# Altium PCB Controller.PcbDoc (part 2 of 2)
Units mil, origin at the board's own origin, x right, y up, seen from the top; angles counter-clockwise.
Board outline 3937.01 x 3937.01 mil, 4 copper layers (Top Layer, GND1, Layer 2, GND2), stack 23.756 mil thick; 99 components, 64 nets, 313 pads, 83 vias.
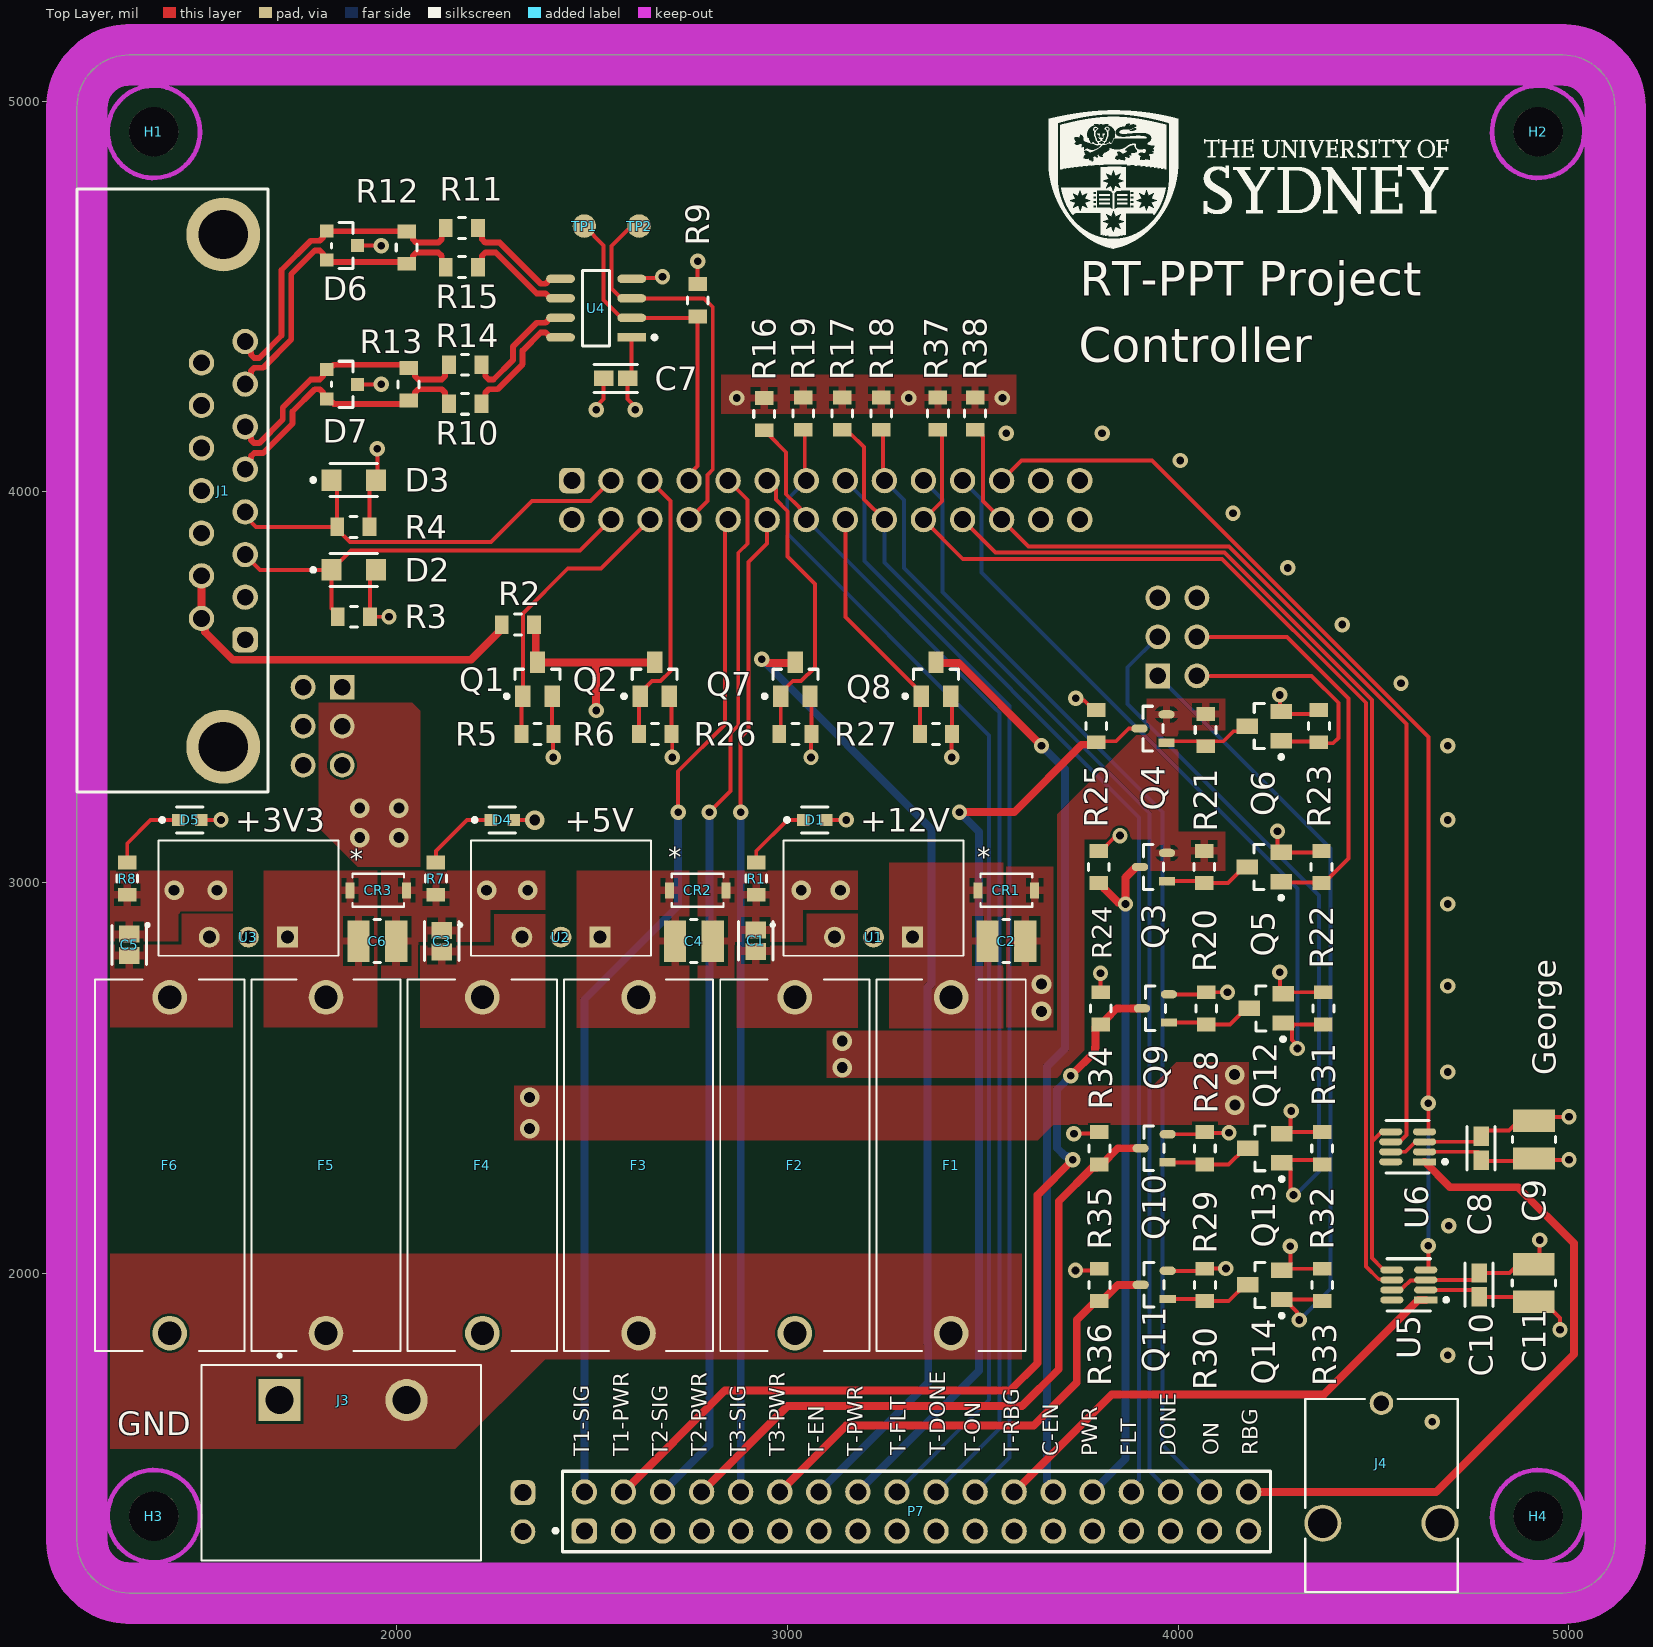
[diagram p0: Top Layer view]

## Via types
v1: diameter 39.37, hole 19.68, Top Layer to GND2, 64 vias
v2: diameter 50, hole 28, Top Layer to GND2, 19 vias

## Nets (pads, with @x,y where several pads share a name; then routed paths per layer and width w, separated by ;. In a path a pad name is that pad's centre, name@x,y a point inside that pad or via, vN(x,y) a via of type N, cw(c..) or ccw(c..) an arc to the next point about the centre after c; other vN are vias at no path point) (continued)
RS422-TX_N: (continued)
  Top Layer w15: J1.7 1611.81,4288.99 1626.32,4303.5 1626.32,4308.71 1635.11,4317.5 1657.89,4317.5 1729.84,4389.45 1729.84,4557.16 1790.18,4617.5 1802.61,4617.5 1811.4,4608.71 1811.4,4601.83 D6.2 1825.1,4588.13 2020.53,4588.13 R12.1 ; R12.1@2030.91,4583.66 2041.12,4593.88 2041.12,4603.71 2049.91,4612.5 2106.16,4612.5 2114.95,4603.71 2114.95,4585.05 R15.2
RS422-TX_P: D6.1 J1.8 R11.2 R12.2 | length 817.1
  Top Layer w15: J1.8 1611.81,4371.01 1626.32,4356.5 1626.32,4351.29 1635.11,4342.5 1647.54,4342.5 1704.84,4399.81 1704.84,4567.52 1779.83,4642.5 1802.61,4642.5 1811.4,4651.29 1811.4,4658.17 D6.1 1821.16,4666.87 2024.47,4666.87 R12.2 ; R12.2@2030.91,4666.34 2041.12,4656.12 2041.12,4646.29 2049.91,4637.5 2106.16,4637.5 2114.95,4646.29 2114.95,4664.95 R11.2
RX_N: R14.2 U4.7 | length 314.5
  Top Layer w15: R14.2 2226.39,4314.95 2226.39,4296.29 2235.18,4287.5 2247.6,4287.5 2297.02,4336.92 2297.02,4371.47 2358.05,4432.5 2380.83,4432.5 2393.33,4445 U4.7
RX_P: R10.2 U4.8 | length 314.5
  Top Layer w15: R10.2 2226.39,4235.05 2226.39,4253.71 2235.18,4262.5 2257.96,4262.5 2322.02,4326.56 2322.02,4361.12 2368.41,4407.5 2380.83,4407.5 2393.33,4395 U4.8
SDI: P2.22 U5.5 U6.5 | length 2788.8
  Top Layer w10: P2.22 3532.42,3844 4118.63,3844 4496,3466.63 4496,2337.34 ; U6.5 4521,2361.85 4515.37,2356.22 4514.88,2356.22 4496,2337.34 ; U5.5 4544.09,2010.97 4523.41,2010.97 4496,2038.38 4496,2337.34
Serial-RX: P2.7 R9.2 TP1.1 U4.2 | length 900.1
  Top Layer w10: TP1.1 2529.29,4630.71 2529.29,4490.67 2574.96,4445 U4.2 2766.34,4445 R9.2 2770,4065.62 2747.83,4043.45 P2.7
Serial-TX: P2.8 TP2.1 U4.3 | length 1048.8
  Top Layer w10: TP2.1 2610.43,4670.43 2590.43,4670.43 2549.29,4629.29 2549.29,4520.67 2574.96,4495 U4.3 2786.21,4495 2808.62,4472.59 2808.62,4056.52 2795.31,4043.21 2795.31,3976.06 P2.8
Switching_Signal: J4.1 P2.25 | length 2909.9
  Layer 2 w20: P2.25 3655.31,4036.06 3655.31,4069.47 3676.84,4091 3783.02,4091 4520,3354.02 J4.1
T1_Pwr: P7.4 Q9.3 R34.2 | length 2298.4
  Top Layer w20: P7.4 2840,1700 3570,1700 3640,1770 3640,2200 v1(3730,2290) ; v1(3725,2505) 3787.2,2567.2 3787.2,2577.2 3787.95,2577.95 3787.95,2628.59 3795.67,2636.3 3807.48,2636.3 3815.2,2644.02 3815.2,2649.92 3842.91,2677.64 Q9.3
  GND2 w20: v1(3725,2505) 3725,2504.73 3690,2469.73 3690,2320 3710.31,2299.69 3715.07,2299.69 3724.76,2290 v1(3730,2290)
T1_Pwr_FPGA: P2.21 Q12.1 R31.2 | length 1975.5
  Top Layer w10: Q12.1 4276.06,2640.24 4290.75,2625.55 4290.75,2597.2 4305,2582.95 v1(4305,2575) ; Q12.1@4292.25,2630.44 4298.11,2636.3 R31.2
  GND2 w10: P2.21 3496.31,3980.1 3496.31,3793.69 4305,2985 v1(4305,2575)
T1_Sig_FPGA: P2.10 P7.2 | length 2640.9
  Top Layer w10: v1(2720,3180) 2720,3284.53 2840,3404.53 2840,3920.75 P2.10
  GND2 w20: P7.2 2480,2700 2720,2940 v1(2720,3180)
T2_Pwr: P7.8 Q10.3 R35.2 | length 1739.9
  Top Layer w20: P7.8 3000,1660 3600,1660 3694,1754 3694,2184 3780.48,2270.48 3790.47,2270.48 R35.2 3804.09,2278.19 3845.43,2319.53 Q10.3
T2_Pwr_FPGA: J2.3 Q13.1 R32.2 | length 1904.4
  Top Layer w10: v1(4295,2200) 4295,2207.95 4287.36,2215.59 4287.36,2267.44 4272.68,2282.13 Q13.1 4272.67,2290 4356.38,2290 R32.2
  GND2 w10: J2.3 3870,3550.75 3870,3456.77 4360,2966.77 4360,2260 4300,2200 v1(4295,2200)
T2_Sig_FPGA: P2.9 P7.6 | length 2706.6
  Top Layer w10: v1(2800,3180) 2854,3234 2854,3381.76 2873.83,3401.6 2873.83,3843.83 2897,3867 2897,3979.42 P2.9@2842.31,4034.1
  GND2 w20: P7.6 2800,1560 v1(2800,3180)
T3_Pwr: P7.12 Q11.3 R36.2 | length 1237.1
  Top Layer w20: P7.12 3150,1610 3630,1610 3740,1720 3740,1880 3780.94,1920.94 3796.54,1920.94 3845.59,1970 Q11.3
T3_Pwr_FPGA: J2.1 Q14.1 R33.2 | length 2037.9
  Top Layer w10: Q14.1 Q14.1@4272.83,1932.6 ; v1(4310,1880) 4304.38,1885.62 4304.38,1901.05 Q14.1@4272.83,1932.6 ; R33.2 4364.41,1932.6 Q14.1@4272.83,1932.6
  GND2 w10: J2.1 4390,3086.42 4390,1960 v1(4310,1880)
T3_Sig_FPGA: P2.12 P7.10 | length 2516.7
  Top Layer w10: v1(2880,3180) 2880,3370.99 2899.83,3390.83 2899.83,3819.83 2947.83,3867.83 P2.12
  GND2 w20: P7.10 v1(2880,3180)
TX_N: R15.1 U4.6 | length 286.4
  Top Layer w15: R15.1 2217.73,4585.05 2217.73,4603.71 2226.52,4612.5 2253.05,4612.5 2358.05,4507.5 2380.83,4507.5 2393.33,4495 U4.6
TX_P: R11.1 U4.5 | length 286.4
  Top Layer w15: R11.1 2217.73,4664.95 2217.73,4646.29 2226.52,4637.5 2263.41,4637.5 2368.41,4532.5 2380.83,4532.5 2393.33,4545 U4.5
pads on no net: H1. H2. H3. H4. J2.5 J2.6 J4.2 J4.3 P2.1 P2.2 P2.26 P2.27 P2.28 U5.8 U6.8

## Polygon pours and split planes (outlines as drawn)
GND on Top Layer "Top Layer-GND" (solid, remove dead copper, pour order 14): 2770,2755 2865,2755 2865,2848.15 3038.89,2848.15 3038.89,2930 3180,2930 3180,3030 2770,3030
GND on Top Layer "NONET_L-01_P-001" (solid, remove dead copper, pour order 15): 3560,2630 3560,3040 3680,3040 3680,2630
GND on Top Layer "Top Layer-GND 1" (solid, remove dead copper, pour order 12): 1960,3030 1960,2848.27 1960.2,2848.27 1960,2848.08 1960,2755 2055,2755 2055,2848.27 2238.83,2848.27 2238.83,2930 2380,2930 2380,3030
NetC2_1 on Top Layer "NONET_L-01_P-001" (solid, remove dead copper, pour order 10): 3260,3050 3260,2626.97 3552.71,2626.97 3552.71,3050
NetC4_1 on Top Layer "NONET_L-01_P-001" (solid, remove dead copper, pour order 7): 2460,3030 2460,2628.27 2748.83,2628.27 2748.83,3030
NetC6_1 on Top Layer "NONET_L-01_P-001" (solid, remove dead copper, pour order 4): 1660,3030 1660,2630 1950,2630 1950,3030
+24V on Top Layer "NONET_L-01_P-001" (solid, remove dead copper, pour order 1): 1150,1550 2150,1550 2380,1780 3600,1780 3600,2050 1150,2050
Dump_LED on Top Layer "Top Layer-Dump_LED" (solid, remove dead copper, pour order 31): 3930,3030 4120,3030 4120,3130 4000,3130 4000,3390 4120,3390 4120,3470 3920,3470 3920,3405 3690,3175 3690,2620 3100,2620 3100,2500 3690,2500 3760,2570 3760,3110 3930,3110
+5V on Top Layer "Top Layer-+5V" (solid, remove dead copper, pour order 34): 2300,2340 3640,2340 3680,2380 4180,2380 4180,2535 4180,2540 3995,2540 3935,2480 2300,2480
+3V3 on Top Layer "NONET_L-01_P-001" (solid, remove dead copper, pour order 32): 2830,4300 2830,4200 3585,4200 3585,4300
+5V on Top Layer "NONET_L-01_P-001" (solid, remove dead copper, pour order 25): 1800,3460 1800,3140 1900,3040 2060,3040 2060,3440 2040,3460
NetC1_1 on Top Layer "NONET_L-01_P-001" (solid, remove dead copper, pour order 8): 3180,2920 3180,2628.15 2870,2628.15 2870,2838.15 3048.89,2838.15 3048.89,2920
NetC5_1 on Top Layer "NONET_L-01_P-001" (solid, remove dead copper, pour order 2): 1580,2920 1580,2630 1230,2630 1230,2840 1450,2840 1450,2920
NetC3_1 on Top Layer "NONET_L-01_P-001" (solid, remove dead copper, pour order 5): 2380,2918.27 2380,2628.27 2060,2628.27 2060,2838.27 2248.83,2838.27 2248.83,2918.27
GND on Top Layer "NONET_L-01_P-001" (solid, remove dead copper, pour order 3): 1230,3030 1230,2850 1440,2850 1440,2920 1580,2920 1580,3030
+5V on GND2 "GND2-+5V" (solid, remove dead copper, pour order 23): 2086.61,1377.95 2401.57,1377.95 2401.57,1929.13 2401.57,3220 1976.85,3220 1800,3220 1800,3140 2086.61,2853.39 2086.61,1929.13
Dump_LED on GND2 "NONET_L-01_P-001" (solid, remove dead copper, pour order 17): 2874.02,1771.65 2874.02,3228.35 1496.06,3228.35 1496.06,3779.53 1653.54,3779.53 1653.54,3775.15 2002.95,3464.57 3188.98,3464.57 3188.98,1771.65
GND on GND2 "NONET_L-01_P-001" (solid, remove dead copper, pour order 19): 3520,4182 3520,4039.06 4448.82,3110.24 4448.82,1574.8 4730,1574.8 4730,3400 3948,4182
+5V on GND2 "NONET_L-01_P-001" (solid, remove dead copper, pour order 24): 3990,2760 3990,1710 4180,1710 4180,2760
GND on GND1 "NONET_L-01_P-001" (solid, remove dead copper, pour order 20): 1122.05,5118.11 5118.11,5118.11 5118.11,1240.16 5059.06,1181.1 1122.05,1181.1
+3V3 on Layer 2 "NONET_L-01_P-001" (solid, remove dead copper, pour order 21): 1141.73,5118.11 5137.8,5118.11 5137.8,1240.16 5078.74,1181.1 1141.73,1181.1

## Keep-outs
Keep-Out Layer:
  lines w157.48: 1181.1,1315.52 ccw(c1315.52,1315.52) 1315.52,1181.1 4983.69,1181.1 ccw(c4983.69,1315.52) 5118.11,1315.52 5118.11,4983.69 ccw(c4983.69,4983.69) 4983.69,5118.11 2047.24,5118.11 1315.52,5118.11 ccw(c1315.52,4983.69) 1181.1,4983.69 1181.1,1315.52

## Silkscreen, mask and mechanical layers (free items; w line width, h text height)
Top Overlay:
  drawing of 30 lines, arcs and shapes, not listed
  text "RT-PPT Project" at 3747.85,4471.76 h150
  text "Controller" at 3745,4302.08 h150
  text "+3V3" at 1586,3130 h60
  text "+5V" at 2430,3130 h60
  text "+12V" at 3186,3130 h60
  text "George" at 4985.3,2506.22 h100 r90
  text "GND" at 1285,1585 h60
  text "T-FLT" at 3303.13,1534.23 h40 r90
  text "T-DONE" at 3403.13,1534.23 h40 r90
  text "ON" at 4103.13,1534.23 h40 r90
  text "RBG" at 4203.13,1534.23 h40 r90
  text "T1-SIG" at 2493,1532 h40 r90
  text "T1-PWR" at 2593,1532 h40 r90
  text "T2-SIG" at 2693,1532 h40 r90
  text "T2-PWR" at 2793,1532 h40 r90
  text "T3-SIG" at 2893,1532 h40 r90
  text "T3-PWR" at 2993,1532 h40 r90
  text "T-EN" at 3093,1532 h40 r90
  text "T-PWR" at 3193,1532 h40 r90
  text "T-ON" at 3493,1532 h40 r90
  text "T-RBG" at 3593,1532 h40 r90
  text "C-EN" at 3693,1532 h40 r90
  text "PWR" at 3793,1532 h40 r90
  text "FLT" at 3893,1532 h40 r90
  text "DONE" at 3993,1532 h40 r90
Bottom Overlay:
  text "GND" at 1790,1510 h60
  text "+24V" at 2140,1510 h60

## Dimensions
4921.26,4921.26 to 4921.26,1377.95 on Mechanical 1
1377.95,4921.26 to 4921.26,4921.26 on Mechanical 1
4983.69,5118.11 to 4983.69,1181.1 on Mechanical 1
1181.11,4933.42 to 5118.11,4983.69 on Mechanical 1

## Text inside footprints (layer, text, board x,y; h text height)
CR1: Top Overlay "*" at 3485,3040 h50
CR2: Top Overlay "*" at 2695,3040 h50
CR3: Top Overlay "*" at 1880,3035 h50
J1: Mechanical 2 "PCB Edge" at 1128.74,3987.09 h40 r270